# EAGLE board dash-board2 (EAGLE 4.16)
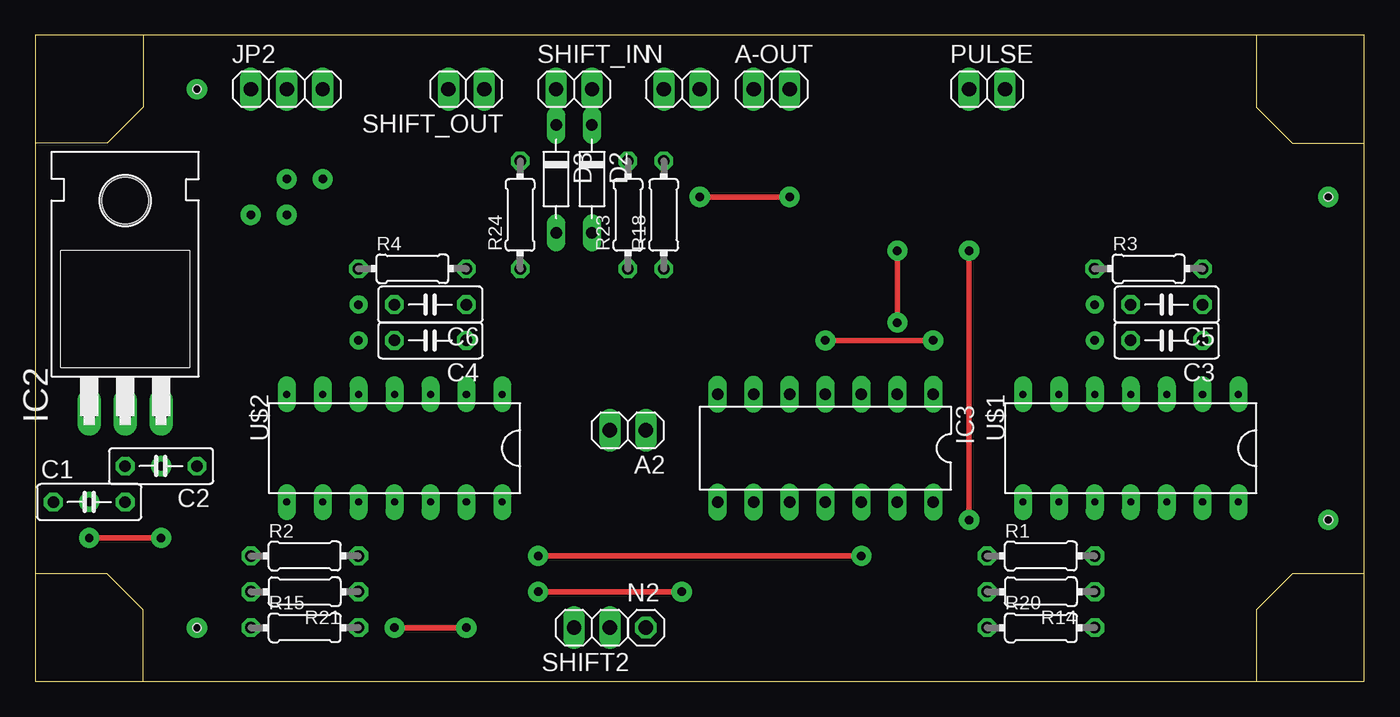
[diagram p0: board, top side]
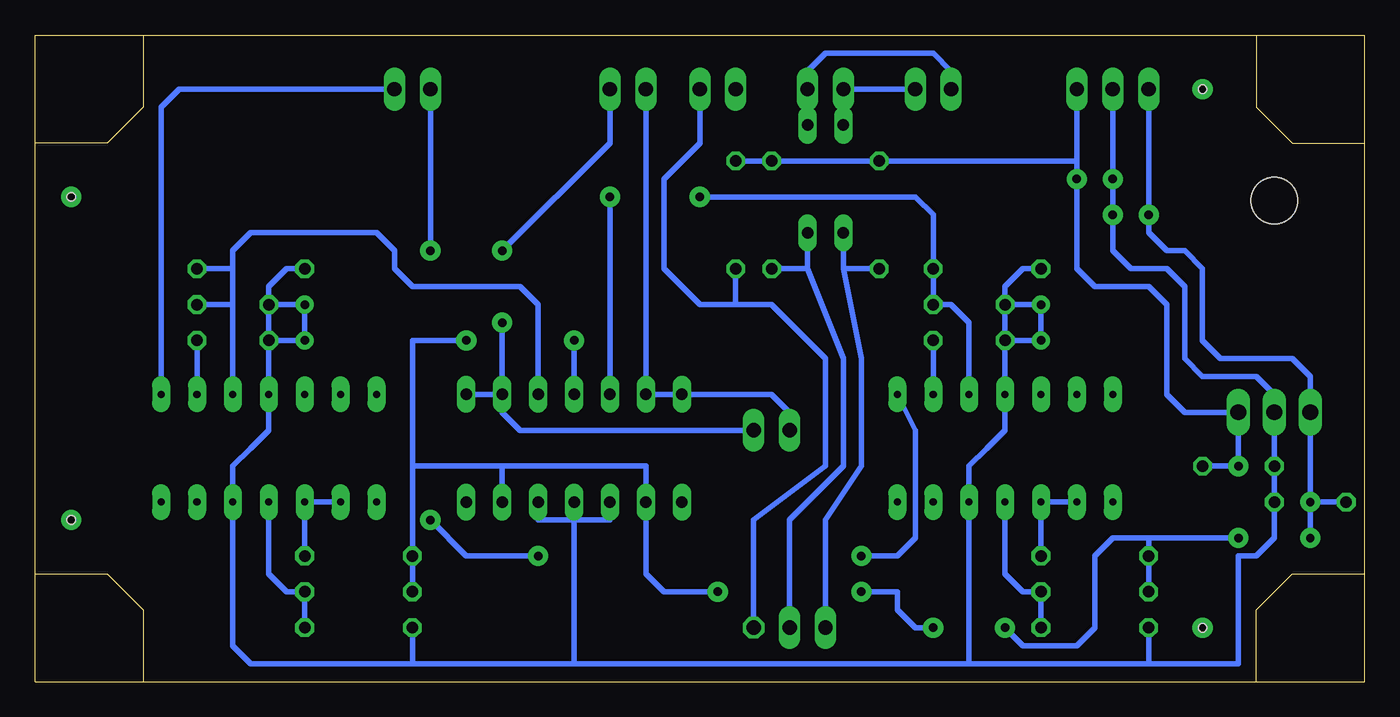
[diagram p1: board, bottom side, seen from below]

Size 93.98 x 45.72 mm. Coordinates in mm from the lower left corner, seen from the top.
Outline: 93.98,7.62 93.98,0 86.36,0
Outline: 93.98,7.62 93.98,38.1
Outline: 93.98,38.1 93.98,45.72 86.36,45.72
Outline: 86.36,45.72 7.62,45.72
Outline: 7.62,45.72 0,45.72 0,38.1
Outline: 0,38.1 0,7.62
Outline: 0,7.62 0,0 7.62,0
Outline: 86.36,0 7.62,0
Outline: 7.62,45.72 7.62,40.64 5.08,38.1 0,38.1
Outline: 86.36,45.72 86.36,40.64 88.9,38.1 93.98,38.1
Outline: 7.62,0 7.62,5.08 5.08,7.62 0,7.62
Outline: 93.98,7.62 88.9,7.62 86.36,5.08 86.36,0
Copper layers (1*16): Top 0.035mm / dielectric 1.5mm / Bottom 0.035mm
Design rules "default": minimum track width 10mil, minimum drill 24mil, track to track 8mil, track to pad 8mil, pad to pad 8mil, via to via 8mil, smd to smd 8mil, copper to edge 40mil, drill to drill 8mil, minimum pad ring 10mil, minimum via ring 8mil, stop-mask expansion 4mil, vias tented up to drill 0mil, thermal gap 10mil
Holes 0.6 mm at 11.43,3.81 11.43,41.91 91.44,34.29 91.44,11.43
tKeepout: area 86.4,0 to 94,7.6; area 0,0 to 7.6,7.6; area 86.4,38.1 to 94,45.7; area 0,38.1 to 7.6,45.7

## Footprints (pad centres in the part's own frame; a part is rotated, then mirrored left to right if it is on the bottom)
1X02 = drill 1.016 long: 1 -1.27,0; 2 1.27,0
C050-025X075 = drill 0.813 octagon: 1 -2.54,0; 2 2.54,0
D-7.5 = drill 0.813 long: A 3.81,0; C -3.81,0
TO220H = drill 1.118 long: 1 -2.54,-10.16; 2 0,-10.16; 3 2.54,-10.16 | hole 3.302: 0,4.826
DIL14 = drill 0.813 long: 1 -7.62,-3.81; 2 -5.08,-3.81; 3 -2.54,-3.81; 4 0,-3.81; 5 2.54,-3.81; 6 5.08,-3.81; 7 7.62,-3.81; 8 7.62,3.81; 9 5.08,3.81; 10 2.54,3.81; 11 0,3.81; 12 -2.54,3.81; 13 -5.08,3.81; 14 -7.62,3.81
1X03 = drill 1.016 long: 1 -2.54,0; 2 0,0; 3 2.54,0
1X01 = drill 1.016 octagon: 1 0,0
0204/7 = drill 0.813 octagon: 1 -3.81,0; 2 3.81,0
DIL14' = drill 0.5 pad 1.27 long: 1 -3.81,7.62; 2 -3.81,5.08; 3 -3.81,2.54; 4 -3.81,0; 5 -3.81,-2.54; 6 -3.81,-5.08; 7 -3.81,-7.62; 8 3.81,-7.62; 9 3.81,-5.08; 10 3.81,-2.54; 11 3.81,0; 12 3.81,2.54; 13 3.81,5.08; 14 3.81,7.62

## Placement (x,y rotation side)
A2  [1X02]  41.91,17.78 180 top
A-OUT  [1X02]  52.07,41.91 0 top
C1  [C050-025X075]  3.81,12.7 0 top
C2  [C050-025X075]  8.89,15.24 180 top
C3  [C050-025X075]  80.01,24.13 180 top
C4  [C050-025X075]  27.94,24.13 180 top
C5  [C050-025X075]  80.01,26.67 180 top
C6  [C050-025X075]  27.94,26.67 180 top
D2  [D-7.5]  39.37,35.56 270 top
D3  [D-7.5]  36.83,35.56 270 top
IC2  7805T  [TO220H]  6.35,29.21 0 top
IC3  LM324N  [DIL14]  55.88,16.51 180 top
JP2  [1X03]  17.78,41.91 0 top
N  [1X02]  45.72,41.91 0 top
N2  [1X01]  43.18,3.81 0 top
PULSE  [1X02]  67.31,41.91 0 top
R1  [0204/7]  71.12,8.89 0 top
R2  [0204/7]  19.05,8.89 0 top
R3  [0204/7]  78.74,29.21 0 top
R4  [0204/7]  26.67,29.21 0 top
R14  [0204/7]  71.12,6.35 180 top
R15  [0204/7]  19.05,3.81 0 top
R18  [0204/7]  44.45,33.02 90 top
R20  [0204/7]  71.12,3.81 0 top
R21  [0204/7]  19.05,6.35 180 top
R23  [0204/7]  41.91,33.02 90 top
R24  [0204/7]  34.29,33.02 90 top
SHIFT2  [1X02]  39.37,3.81 180 top
SHIFT_IN  [1X02]  38.1,41.91 0 top
SHIFT_OUT  [1X02]  30.48,41.91 180 top
U$1  LM2917  [DIL14']  77.47,16.51 270 top
U$2  LM2917  [DIL14']  25.4,16.51 270 top

## Library data of the parts
A2 A-OUT JP2 N N2 PULSE SHIFT2 SHIFT_IN SHIFT_OUT = pinhead
C1-C6 R1-R4 R14 R15 R18 R20 R21 R23 R24 = rcl
D2 D3 = diode
IC2 IC3 = linear
U$1 U$2 = rnie04

## Nets
0V: C1.2 C2.2 C3.2 C4.2 C5.2 C6.2 IC2.2 IC3.10 IC3.11 IC3.12 JP2.2 R3.1 R4.1 R15.1 R20.1 U$1.4 U$1.12 U$2.4 U$2.12
+5V: C2.1 IC2.3 JP2.3 R18.2 R23.2 R24.2
+12V: C1.1 IC2.1 IC3.4 IC3.9 IC3.13 JP2.1 R1.1 R2.1 R14.2 R21.2
N$1: PULSE.2 U$1.1
N$2: R1.2 U$1.9 U$1.10
N$3: R2.2 U$2.9 U$2.10
N$14: C3.1 U$1.2
N$15: C4.1 U$2.2
N$16: C6.1 IC3.5 R4.2 U$2.3
N$17: C5.1 IC3.3 R3.2 U$1.3
N$19: PULSE.1 U$2.1
N$23: U$1.8
N$37: A2.1 A-OUT.2 IC3.1 IC3.2
N$38: A2.2 A-OUT.1 IC3.6 IC3.7
N$39: D2.C SHIFT_IN.2 SHIFT_OUT.2
N$40: D3.A R24.1 SHIFT2.2
N$42: R14.1 R20.2 U$1.11
N$47: N2.1 N.2 R18.1
N$50: U$2.8
N$51: U$2.5
N$52: U$1.5
N$53: R15.2 R21.1 U$2.11
N$65: D2.A R23.1 SHIFT2.1
N$67: D3.C SHIFT_IN.1 SHIFT_OUT.1

## Tracks (layer width: path | path; a pad name or v marks a point on that pad's centre or on a via)
0V  (via drill 0.6 pad 1.27, 0.6 pad 1.42)
  Bottom 0.406: C4.2 U$2.4 25.4,17.78 26.67,16.51 27.94,15.24 U$2.12 27.94,1.27 | C3.2 U$1.4 77.47,17.78 78.74,16.51 80.01,15.24 U$1.12 80.01,2.54 78.74,1.27 67.31,1.27 | C5.2 77.47,27.94 76.2,29.21 R3.1 | C3.2 C5.2 | C4.2 C6.2 | C6.2 25.4,27.94 24.13,29.21 R4.1 | JP2.2 v17.78,35.56 v17.78,33.02 17.78,30.48 16.51,29.21 13.97,29.21 12.7,27.94 12.7,22.86 11.43,21.59 7.62,21.59 6.35,20.32 IC2.2 C2.2 C1.2 6.35,10.16 7.62,8.89 8.89,8.89 8.89,1.27 15.24,1.27 | 55.88,1.27 55.88,11.43 | 55.88,11.43 IC3.11 | 15.24,1.27 27.94,1.27 | 27.94,1.27 55.88,1.27 | 55.88,1.27 67.31,1.27 | IC3.12 58.42,11.43 55.88,11.43 | IC3.10 53.34,11.43 55.88,11.43 | 67.31,1.27 R20.1 | 15.24,1.27 R15.1 | C4.2 v22.86,24.13 v22.86,26.67 C6.2 | C3.2 v74.93,24.13 v74.93,26.67 C5.2
+5V  (via drill 0.6 pad 1.42)
  Bottom 0.406: 20.32,36.83 JP2.3 | 20.32,36.83 v20.32,35.56 20.32,29.21 19.05,27.94 15.24,27.94 13.97,26.67 13.97,20.32 12.7,19.05 IC2.3 v8.89,15.24 C2.1 | 20.32,36.83 R24.2 R23.2 R18.2
+12V  (via drill 0.6 pad 1.42)
  Top 0.406: v3.81,10.16 v8.89,10.16 | v25.4,3.81 v30.48,3.81 | v35.56,6.35 v45.72,6.35 | v63.5,24.13 v55.88,24.13
  Bottom 0.406: JP2.1 v15.24,33.02 15.24,31.75 13.97,30.48 12.7,30.48 11.43,29.21 11.43,24.13 10.16,22.86 5.08,22.86 3.81,21.59 IC2.1 v3.81,12.7 | C1.1 v3.81,12.7 | R1.1 R14.2 | R21.2 R2.1 15.24,10.16 | 60.96,15.24 50.8,15.24 IC3.9 50.8,7.62 49.53,6.35 v45.72,6.35 | v8.89,10.16 15.24,10.16 | v3.81,12.7 v3.81,10.16 | 15.24,10.16 17.78,10.16 19.05,8.89 19.05,3.81 20.32,2.54 24.13,2.54 v25.4,3.81 | v30.48,3.81 31.75,3.81 33.02,5.08 33.02,6.35 v35.56,6.35 | IC3.13 60.96,15.24 | 60.96,15.24 67.31,15.24 R1.1 | R1.1 67.31,24.13 v63.5,24.13 | v55.88,24.13 IC3.4
N$1
  Bottom 0.406: U$1.1 85.09,40.64 83.82,41.91 PULSE.2
N$2
  Bottom 0.406: U$1.10 U$1.9 U$1.10 | R1.2 U$1.10
N$3
  Bottom 0.406: U$2.10 U$2.9 U$2.10 | R2.2 U$2.10
N$4  (via drill 0.6 pad 1.42)
  other vias: 11.43,3.81
N$5  (via drill 0.6 pad 1.42)
  other vias: 11.43,41.91
N$6  (via drill 0.6 pad 1.42)
  other vias: 91.44,34.29
N$7  (via drill 0.6 pad 1.42)
  other vias: 91.44,11.43
N$14
  Bottom 0.406: U$1.2 C3.1
N$15
  Bottom 0.406: U$2.2 C4.1
N$16  (via drill 0.6 pad 1.42)
  Top 0.406: v46.99,34.29 v53.34,34.29
  Bottom 0.406: C6.1 R4.2 | U$2.3 27.94,25.4 29.21,26.67 C6.1 | C6.1 30.48,33.02 31.75,34.29 v46.99,34.29 | v53.34,34.29 IC3.5
N$17
  Bottom 0.406: 80.01,26.67 U$1.3 | 80.01,26.67 C5.1 | IC3.3 58.42,26.67 59.69,27.94 67.31,27.94 68.58,29.21 68.58,30.48 69.85,31.75 78.74,31.75 80.01,30.48 80.01,29.21 | 80.01,29.21 80.01,26.67 | 80.01,29.21 R3.2
N$19  (via drill 0.6 pad 1.42)
  Top 0.406: v66.04,11.43 v66.04,30.48 | v58.42,8.89 v35.56,8.89
  Bottom 0.406: v66.04,30.48 PULSE.1 | v66.04,11.43 63.5,8.89 v58.42,8.89 | v35.56,8.89 33.02,8.89 31.75,10.16 31.75,17.78 U$2.1
N$37  (via drill 0.6 pad 1.42)
  Top 0.406: v60.96,30.48 v60.96,25.4
  Bottom 0.406: IC3.2 IC3.1 | A2.1 59.69,17.78 60.96,19.05 IC3.2 | v60.96,30.48 53.34,38.1 A-OUT.2 | v60.96,25.4 IC3.2
N$38
  Bottom 0.406: 46.99,20.32 IC3.7 IC3.6 | A2.2 40.64,19.05 41.91,20.32 46.99,20.32 | 46.99,20.32 IC3.6 | IC3.6 A-OUT.1
N$39
  Bottom 0.406: D2.C SHIFT_IN.2 39.37,43.18 38.1,44.45 30.48,44.45 29.21,43.18 SHIFT_OUT.2
N$40
  Bottom 0.406: SHIFT2.2 38.1,11.43 35.56,15.24 35.56,22.86 36.83,29.21 | 36.83,29.21 R24.1 | 36.83,29.21 D3.A
N$42
  Bottom 0.406: U$1.11 77.47,7.62 76.2,6.35 R14.1 R20.2
N$47
  Bottom 0.406: N2.1 43.18,11.43 38.1,15.24 38.1,22.86 41.91,26.67 44.45,26.67 | N.2 46.99,38.1 49.53,35.56 49.53,29.21 46.99,26.67 44.45,26.67 | 44.45,26.67 R18.1
N$53
  Bottom 0.406: R15.2 R21.1 24.13,6.35 25.4,7.62 U$2.11
N$65
  Bottom 0.406: SHIFT2.1 40.64,11.43 36.83,15.24 36.83,22.86 39.37,29.21 | 39.37,29.21 R23.1 | 39.37,29.21 D2.A
N$67
  Bottom 0.406: SHIFT_OUT.1 SHIFT_IN.1 D3.C